# EAGLE board panel4 (EAGLE 7.0.0)
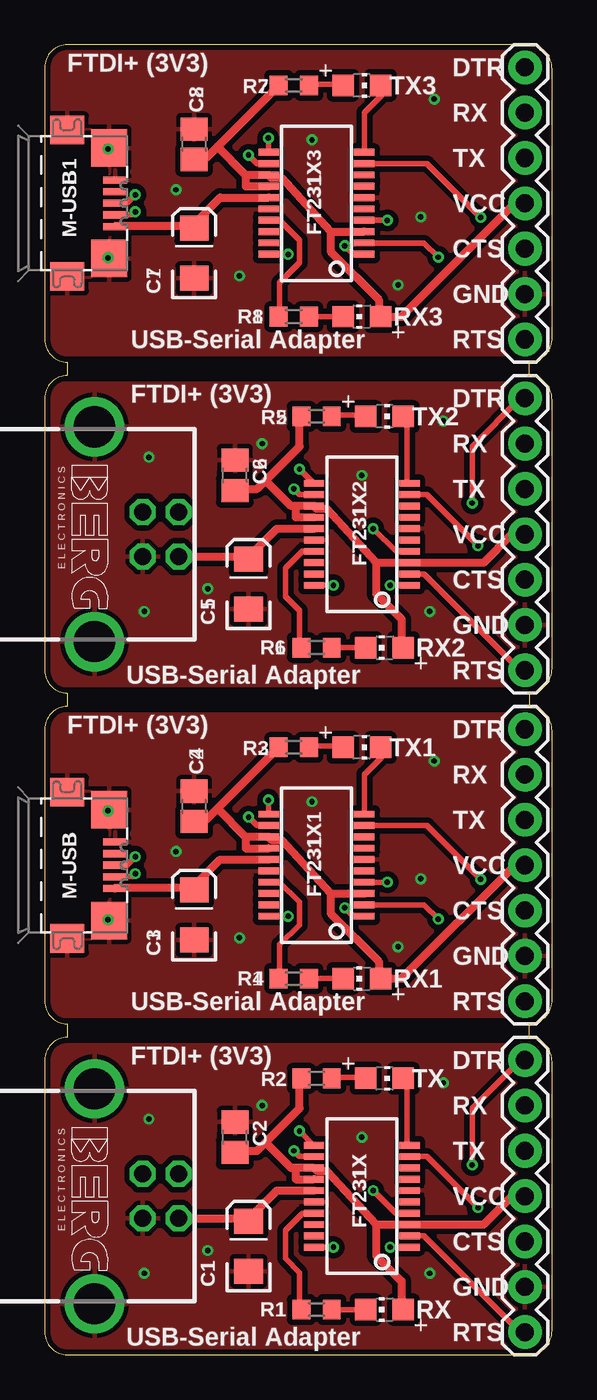
[diagram p0: board, top side]
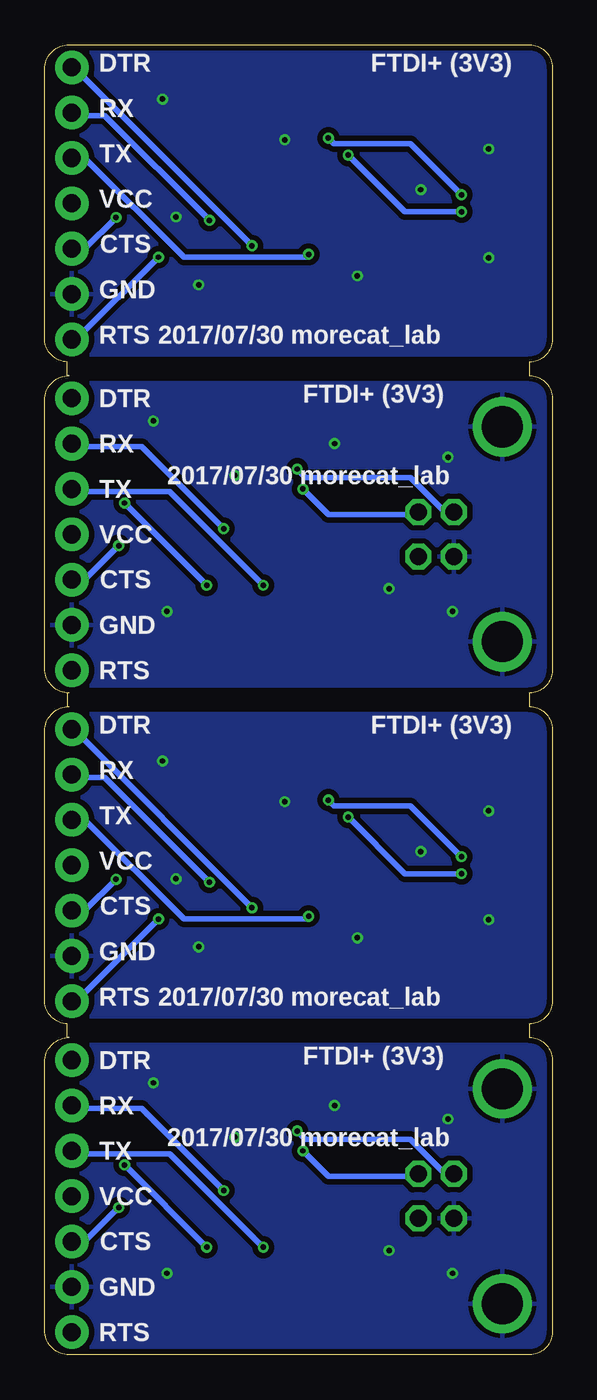
[diagram p1: board, bottom side, seen from below]

Size 28.45 x 73.41 mm. Coordinates in mm from the lower left corner, seen from the top.
Outline: 27.08,36.32 arc-90 28.45,34.95 28.45,19.91 arc-90 27.18,18.54 27.18,17.78 27.08,17.78 arc-90 28.45,16.41 28.45,1.37 arc-90 27.08,0 1.27,0 arc-90 0,1.27 0,16.51 arc-90 1.27,17.78 1.27,18.54 arc-90 0,19.81 0,35.05 arc-90 1.27,36.32 1.27,37.08 arc-90 0,38.35 0,53.59 arc-90 1.27,54.86 1.27,55.63 arc-90 0,56.9 0,72.14 arc-90 1.27,73.41 27.08,73.41 arc-90 28.45,72.04 28.45,56.99 arc-90 27.18,55.63 27.18,54.86 27.08,54.86 arc-90 28.45,53.5 28.45,38.45 arc-90 27.08,37.08
Outline: 27.18,37.08 27.18,36.32
Copper layers (1*16): Top 0.035mm / dielectric 1.5mm / Bottom 0.035mm
Design rules "Elecrow_2-layer_eagle_rule": minimum track width 6mil, minimum drill 12mil, track to track 6mil, track to pad 6mil, pad to pad 6mil, via to via 6mil, smd to smd 0mil, copper to edge 10mil, drill to drill 10mil, minimum pad ring 10mil, minimum via ring 6mil, stop-mask expansion 2mil, vias tented up to drill 100mil, thermal gap 10mil
Net classes: 0 default: width 0.305 mm; 1 PWR: width 0.457 mm
tRestrict: area 0,17.8 to 27.9,18.5; area 0,54.9 to 27.9,55.6; area 0,36.3 to 27.9,37.1
bRestrict: area 0,17.8 to 27.9,18.5; area 0,54.9 to 27.9,55.6; area 0,36.3 to 27.9,37.1

## Footprints (pad centres in the part's own frame; a part is rotated, then mirrored left to right if it is on the bottom)
EIA3216 = smd 1.4 x 1.6: A 1.4,0; C -1.4,0
C0805 = smd 1.3 x 1.5: 1 -0.85,0; 2 0.85,0
SSOP20_L = smd 0.381 x 1.143: 1 -2.857,-2.68; 2 -2.223,-2.68; 3 -1.587,-2.68; 4 -0.953,-2.68; 5 -0.318,-2.68; 6 0.318,-2.68; 7 0.953,-2.68; 8 1.587,-2.68; 9 2.223,-2.68; 10 2.857,-2.68; 11 2.857,2.68; 12 2.223,2.68; 13 1.587,2.68; 14 0.953,2.68; 15 0.318,2.68; 16 -0.318,2.68; 17 -0.953,2.68; 18 -1.587,2.68; 19 -2.223,2.68; 20 -2.857,2.68
1X07 = drill 1.016 pad 1.88: 1 0,0; 2 2.54,0; 3 5.08,0; 4 7.62,0; 5 10.16,0; 6 12.7,0; 7 15.24,0
ZX62R-B-5P = smd 1.35 x 0.4: 1 2.675,-1.3; 2 2.675,-0.65; 3 2.675,0; 4 2.675,0.65; 5 2.675,1.3 | smd 1.9 x 1.6: M1 0,-4.1; M2 0,4.1 | smd 2 x 2.1: M3 2.35,3.1; M4 2.35,-3.1
R0603 = smd 1 x 1.1: 1 -0.85,0; 2 0.85,0
CHIP-LED0805 = smd 1.2 x 1.2: A 0,-1.05; C 0,1.05
PN61729-S = drill 0.95 octagon: 1 1.25,4.71; 2 -1.25,4.71; 3 -1.25,2.71; 4 1.25,2.71 | drill 2.3 pad 2.9: S1 -6.02,0; S2 6.02,0

## Placement (x,y rotation side)
C1  10uF  [EIA3216]  11.43,6.1 90 top
C2  1uF  [C0805]  10.67,12.19 90 top
C3  10uF  [EIA3216]  8.38,24.64 90 top
C4  1uF  [C0805]  8.38,30.73 90 top
C5  10uF  [EIA3216]  11.43,43.18 90 top
C6  1uF  [C0805]  10.67,49.28 90 top
C7  10uF  [EIA3216]  8.38,61.72 90 top
C8  1uF  [C0805]  8.38,67.82 90 top
FT231X  FT231XS  [SSOP20_L]  17.78,8.89 90 top
FT231X1  FT231XS  [SSOP20_L]  15.24,27.43 90 top
FT231X2  FT231XS  [SSOP20_L]  17.78,45.97 90 top
FT231X3  FT231XS  [SSOP20_L]  15.24,64.52 90 top
JP1  [1X07]  26.92,19.81 90 top
JP2  [1X07]  26.92,1.27 90 top
JP3  [1X07]  26.92,38.35 90 top
JP4  [1X07]  26.92,56.9 90 top
M-USB  MICROUSB  [ZX62R-B-5P]  1.27,27.43 0 top
M-USB1  MICROUSB  [ZX62R-B-5P]  1.27,64.52 0 top
R1  1K  [R0603]  15.24,2.54 0 top
R2  1K  [R0603]  15.24,15.49 180 top
R3  1K  [R0603]  13.97,34.04 180 top
R4  1K  [R0603]  13.97,21.08 0 top
R5  1K  [R0603]  15.24,52.58 180 top
R6  1K  [R0603]  15.24,39.62 0 top
R7  1K  [R0603]  13.97,71.12 180 top
R8  1K  [R0603]  13.97,58.17 0 top
RX  [CHIP-LED0805]  19.05,2.54 90 top
RX1  [CHIP-LED0805]  17.78,21.08 90 top
RX2  [CHIP-LED0805]  19.05,39.62 90 top
RX3  [CHIP-LED0805]  17.78,58.17 90 top
TX  [CHIP-LED0805]  19.05,15.49 270 top
TX1  [CHIP-LED0805]  17.78,34.04 270 top
TX2  [CHIP-LED0805]  19.05,52.58 270 top
TX3  [CHIP-LED0805]  17.78,71.12 270 top
X1  PN61729-S  [PN61729-S]  2.79,8.89 270 top
X2  PN61729-S  [PN61729-S]  2.79,45.97 270 top

## Library data of the parts
C1 C3 C5 C7 = SparkFun-Passives
C2 C4 C6 C8 = adafruit
FT231X FT231X1-FT231X3 = SparkFun-DigitalIC
JP1-JP4 = SparkFun-Connectors
M-USB M-USB1 = con-hirose
R1-R8 RX RX1-RX3 TX TX1-TX3 = adafruit-2
X1 X2 = con-berg; OC_FARNELL: unknown; OC_NEWARK: unknown

## Nets
3.3V [PWR]: C2.1 FT231X.3 FT231X.13 FT231X.14 JP2.4 R2.2 RX.A
3.3V1 [PWR]: C4.1 FT231X1.3 FT231X1.13 FT231X1.14 JP1.4 R3.2 RX1.A
3.3V2 [PWR]: C6.1 FT231X2.3 FT231X2.13 FT231X2.14 JP3.4 R5.2 RX2.A
3.3V3 [PWR]: C8.1 FT231X3.3 FT231X3.13 FT231X3.14 JP4.4 R7.2 RX3.A
CBUS0: FT231X.18
CBUS1: FT231X1.19
CBUS2: FT231X1.18
CBUS3: FT231X.19
CBUS4: FT231X2.19
CBUS5: FT231X2.18
CBUS6: FT231X3.19
CBUS7: FT231X3.18
CTS: FT231X.9 JP2.3
CTS1: FT231X1.9 JP1.3
CTS2: FT231X2.9 JP3.3
CTS3: FT231X3.9 JP4.3
DCD: FT231X.8
DCD1: FT231X1.8
DCD2: FT231X2.8
DCD3: FT231X3.8
DSR: FT231X.7
DSR1: FT231X1.7
DSR2: FT231X2.7
DSR3: FT231X3.7
DTR: FT231X.1 JP2.7
DTR1: FT231X1.1 JP1.7
DTR2: FT231X2.1 JP3.7
DTR3: FT231X3.1 JP4.7
GND [PWR]: C1.C C2.2 FT231X.6 FT231X.16 JP2.2 X1.4 X1.S1 X1.S2
GND1 [PWR]: C3.C C4.2 FT231X1.6 FT231X1.16 JP1.2 M-USB.5 M-USB.M1 M-USB.M2 M-USB.M3 M-USB.M4
GND2 [PWR]: C7.C C8.2 FT231X3.6 FT231X3.16 JP4.2 M-USB1.5 M-USB1.M1 M-USB1.M2 M-USB1.M3 M-USB1.M4
GND3 [PWR]: C5.C C6.2 FT231X2.6 FT231X2.16 JP3.2 X2.4 X2.S1 X2.S2
N$1: R2.1 TX.A
N$2: FT231X1.11 M-USB.3
N$3: FT231X.11 X1.3
N$4: FT231X.12 X1.2
N$5: FT231X1.12 M-USB.2
N$6: R1.2 RX.C
N$7: R4.2 RX1.C
N$8: R3.1 TX1.A
N$9: FT231X2.11 X2.3
N$10: FT231X2.12 X2.2
N$11: R6.2 RX2.C
N$12: R5.1 TX2.A
N$13: FT231X3.11 M-USB1.3
N$14: FT231X3.12 M-USB1.2
N$15: R8.2 RX3.C
N$16: R7.1 TX3.A
RI: FT231X.5
RI1: FT231X1.5
RI2: FT231X2.5
RI3: FT231X3.5
RTS: FT231X.2 JP2.1
RTS1: FT231X1.2 JP1.1
RTS2: FT231X2.2 JP3.1
RTS3: FT231X3.2 JP4.1
RXD: FT231X.4 JP2.6
RXD1: FT231X1.4 JP1.6
RXD2: FT231X2.4 JP3.6
RXD3: FT231X3.4 JP4.6
RXLED: FT231X.17 R1.1
RXLED1: FT231X1.17 R4.1
RXLED2: FT231X2.17 R6.1
RXLED3: FT231X3.17 R8.1
TXD: FT231X.20 JP2.5
TXD1: FT231X1.20 JP1.5
TXD2: FT231X2.20 JP3.5
TXD3: FT231X3.20 JP4.5
TXLED: FT231X.10 TX.C
TXLED1: FT231X1.10 TX1.C
TXLED2: FT231X2.10 TX2.C
TXLED3: FT231X3.10 TX3.C
VCC [PWR]: C1.A FT231X.15 X1.1
VCC1 [PWR]: C3.A FT231X1.15 M-USB.1
VCC2 [PWR]: C5.A FT231X2.15 X2.1
VCC3 [PWR]: C7.A FT231X3.15 M-USB1.1

## Tracks (layer width: path | path; a pad name or v marks a point on that pad's centre or on a via)
3.3V
  Top 0.457: 12.38,11.91 11.91,11.43 10.79,11.43 C2.1 | 12.38,11.91 14.29,13.81 14.29,15.4 R2.2 | 14.06,10.48 14.06,9.84 FT231X.14 | 18.57,7.3 FT231X.3 24.61,7.3 26.19,8.89 JP2.4 | 18.57,7.3 15.81,10.32 15.24,10.32 FT231X.13 14.06,10.48 | 18.57,7.3 18.57,5.56 20,4.13 20,2.54 RX.A | 12.38,11.91 13.81,10.48 14.06,10.48
3.3V1
  Top 0.457: 9.68,30.61 9.05,29.97 8.41,29.97 C4.1 | 9.68,30.61 13.02,33.94 R3.2 | 11.27,29.02 11.27,28.38 FT231X1.14 | 16.03,25.84 FT231X1.3 | 16.03,25.84 13.27,28.86 12.7,28.86 FT231X1.13 11.27,29.02 | 16.03,25.84 16.03,24.73 18.73,22.04 18.73,21.08 RX1.A 20,21.08 26.35,27.43 JP1.4 | 11.27,29.02 9.68,30.61
3.3V2
  Top 0.457: 12.38,48.99 11.91,48.51 10.79,48.51 C6.1 | 12.38,48.99 14.29,50.9 14.29,52.48 R5.2 | 14.06,47.56 14.06,46.93 FT231X2.14 | 18.57,44.39 FT231X2.3 24.61,44.39 26.19,45.97 JP3.4 | 18.57,44.39 15.81,47.4 15.24,47.4 FT231X2.13 14.06,47.56 | 18.57,44.39 18.57,42.64 20,41.21 20,39.62 RX2.A | 12.38,48.99 13.81,47.56 14.06,47.56
3.3V3
  Top 0.457: 9.68,67.69 9.05,67.06 8.41,67.06 C8.1 | 9.68,67.69 13.02,71.03 R7.2 | 11.27,66.1 11.27,65.47 FT231X3.14 | 16.03,62.93 FT231X3.3 | 16.03,62.93 13.27,65.94 12.7,65.94 FT231X3.13 11.27,66.1 | 16.03,62.93 16.03,61.82 18.73,59.12 18.73,58.17 RX3.A 20,58.17 26.35,64.52 JP4.4 | 11.27,66.1 9.68,67.69
CTS  (via drill 0.3)
  Top 0.305: FT231X.9 21.43,11.11 v24.29,8.26
  Bottom 0.305: v24.29,8.26 26.19,6.35 JP2.3
CTS1  (via drill 0.3)
  Top 0.305: FT231X1.9 21.43,29.65 v24.45,26.64
  Bottom 0.305: v24.45,26.64 26.19,24.89 JP1.3
CTS2  (via drill 0.3)
  Top 0.305: FT231X2.9 21.43,48.2 v24.29,45.34
  Bottom 0.305: v24.29,45.34 26.19,43.43 JP3.3
CTS3  (via drill 0.3)
  Top 0.305: FT231X3.9 21.43,66.74 v24.45,63.72
  Bottom 0.305: v24.45,63.72 26.19,61.98 JP4.3
DTR  (via drill 0.3)
  Top 0.305: v19.37,6.03 FT231X.1 | v23.97,10.64 23.97,13.81 26.67,16.51 JP2.7
  Bottom 0.305: v23.97,10.64 v19.37,6.03
DTR1  (via drill 0.3)
  Top 0.305: FT231X1.1 17.3,24.57 v16.83,25.05
  Bottom 0.305: v16.83,25.05 26.83,35.05 JP1.7
DTR2  (via drill 0.3)
  Top 0.305: v19.37,43.12 FT231X2.1 | v23.97,47.72 23.97,50.9 26.67,53.59 JP3.7
  Bottom 0.305: v23.97,47.72 v19.37,43.12
DTR3  (via drill 0.3)
  Top 0.305: FT231X3.1 17.3,61.66 v16.83,62.13
  Bottom 0.305: v16.83,62.13 26.83,72.14 JP4.7
GND  (via drill 0.3)
  other vias: 5.59,4.57 9.14,5.84 5.84,13.21 21.59,4.57 12.19,13.97 17.78,12.19 22.35,15.24
  pour Top (isolate 0.305): 0,17.78 0,0 28.45,0 28.45,17.78
  pour Bottom (isolate 0.305): 28.45,17.78 0,17.78 0,0 28.45,0
GND1  (via drill 0.3)
  other vias: 3.56,24.38 10.92,23.37 7.37,28.19 3.56,30.48 19.81,22.86 14.99,30.99 21.08,26.67 21.84,33.27
  pour Bottom (isolate 0.305): 28.45,36.32 0,36.32 0,18.54 28.45,18.54
  pour Top (isolate 0.305): 0,36.32 0,18.54 28.45,18.54 28.45,36.32
GND2  (via drill 0.3)
  other vias: 3.56,61.47 10.92,60.45 7.37,65.28 3.56,67.56 19.81,59.94 14.99,68.07 21.08,63.75 21.84,70.36
  pour Bottom (isolate 0.305): 28.45,73.41 0,73.41 0,55.63 28.45,55.63
  pour Top (isolate 0.305): 0,73.41 0,55.63 28.45,55.63 28.45,73.41
GND3  (via drill 0.3)
  other vias: 5.59,41.66 9.14,42.93 5.84,50.29 21.59,41.66 12.19,51.05 17.78,49.28 22.35,52.32
  pour Top (isolate 0.305): 0,54.86 0,37.08 28.45,37.08 28.45,54.86
  pour Bottom (isolate 0.305): 28.45,54.86 0,54.86 0,37.08 28.45,37.08
N$1
  Top 0.305: R2.1 16.19,15.56 17.94,15.56 TX.A
N$2  (via drill 0.3)
  Top 0.305: v12.54,31.08 12.54,30.29 FT231X1.11 | v5.08,27.91 4.6,27.43 M-USB.3
  Bottom 0.305: v12.54,31.08 12.22,30.77 7.94,30.77 v5.08,27.91
N$3  (via drill 0.3)
  Top 0.305: v14.29,12.54 15.08,11.75 FT231X.11
  Bottom 0.305: v14.29,12.54 13.81,12.06 7.94,12.06 6.03,10.16 5.56,10.16 X1.3
N$4  (via drill 0.3)
  Top 0.305: FT231X.12 14.29,11.11 v13.97,11.43
  Bottom 0.305: v13.97,11.43 12.54,10 7.62,10 X1.2
N$5  (via drill 0.3)
  Top 0.305: FT231X1.12 11.91,29.65 v11.43,30.13 | v5.08,26.96 4.92,26.8 3.97,26.8 M-USB.2
  Bottom 0.305: v11.43,30.13 8.26,26.96 v5.08,26.96
N$6
  Top 0.305: RX.C R1.2
N$7
  Top 0.305: RX1.C R4.2
N$8
  Top 0.305: R3.1 14.92,34.1 16.67,34.1 TX1.A
N$9  (via drill 0.3)
  Top 0.305: v14.29,49.62 15.08,48.83 FT231X2.11
  Bottom 0.305: v14.29,49.62 13.81,49.15 7.94,49.15 6.03,47.24 5.56,47.24 X2.3
N$10  (via drill 0.3)
  Top 0.305: FT231X2.12 14.29,48.2 v13.97,48.51
  Bottom 0.305: v13.97,48.51 12.54,47.09 7.62,47.09 X2.2
N$11
  Top 0.305: RX2.C R6.2
N$12
  Top 0.305: R5.1 16.19,52.64 17.94,52.64 TX2.A
N$13  (via drill 0.3)
  Top 0.305: v12.54,68.17 12.54,67.37 FT231X3.11 | v5.08,64.99 4.6,64.52 M-USB1.3
  Bottom 0.305: v12.54,68.17 12.22,67.85 7.94,67.85 v5.08,64.99
N$14  (via drill 0.3)
  Top 0.305: FT231X3.12 11.91,66.74 v11.43,67.22 | v5.08,64.04 4.92,63.88 3.97,63.88 M-USB1.2
  Bottom 0.305: v11.43,67.22 8.26,64.04 v5.08,64.04
N$15
  Top 0.305: RX3.C R8.2
N$16
  Top 0.305: R7.1 14.92,71.18 16.67,71.18 TX3.A
RTS
  Top 0.305: FT231X.2 21.27,6.67 26.67,1.27 JP2.1
RTS1  (via drill 0.3)
  Top 0.305: FT231X1.2 21.27,25.21 v22.07,24.42
  Bottom 0.305: v22.07,24.42 26.67,19.81 JP1.1
RTS2
  Top 0.305: FT231X2.2 21.27,43.75 26.67,38.35 JP3.1
RTS3  (via drill 0.3)
  Top 0.305: FT231X3.2 21.27,62.29 v22.07,61.5
  Bottom 0.305: v22.07,61.5 26.67,56.9 JP4.1
RXD  (via drill 0.3)
  Top 0.305: FT231X.4 19.68,7.94 v18.41,9.21
  Bottom 0.305: v18.41,9.21 23.02,13.81 26.67,13.81 26.83,13.97 JP2.6
RXD1  (via drill 0.3)
  Top 0.305: v19.21,26.48 FT231X1.4
  Bottom 0.305: v19.21,26.48 25.08,32.35 26.67,32.35 26.83,32.51 JP1.6
RXD2  (via drill 0.3)
  Top 0.305: FT231X2.4 19.68,45.02 v18.41,46.29
  Bottom 0.305: v18.41,46.29 23.02,50.9 26.67,50.9 26.83,51.05 JP3.6
RXD3  (via drill 0.3)
  Top 0.305: v19.21,63.56 FT231X3.4
  Bottom 0.305: v19.21,63.56 25.08,69.44 26.67,69.44 26.83,69.6 JP4.6
RXLED
  Top 0.305: FT231X.17 14.45,7.94 13.49,6.99 13.49,5.4 14.29,4.6 14.29,2.54 R1.1
RXLED1
  Top 0.305: FT231X1.17 13.18,26.48 14.29,25.37 14.29,24.1 13.18,22.99 13.18,21.08 R4.1
RXLED2
  Top 0.305: FT231X2.17 14.45,45.02 13.49,44.07 13.49,42.48 14.29,41.69 14.29,39.62 R6.1
RXLED3
  Top 0.305: FT231X3.17 13.18,63.56 14.29,62.45 14.29,61.18 13.18,60.07 13.18,58.17 R8.1
TXD  (via drill 0.3)
  Top 0.305: v16.19,6.03 FT231X.20
  Bottom 0.305: v16.19,6.03 21.43,11.27 26.67,11.27 26.83,11.43 JP2.5
TXD1  (via drill 0.3)
  Top 0.305: v13.65,24.57 FT231X1.20
  Bottom 0.305: v13.65,24.57 13.81,24.42 20.64,24.42 26.19,29.97 JP1.5
TXD2  (via drill 0.3)
  Top 0.305: v16.19,43.12 FT231X2.20
  Bottom 0.305: v16.19,43.12 21.43,48.35 26.67,48.35 26.83,48.51 JP3.5
TXD3  (via drill 0.3)
  Top 0.305: v13.65,61.66 FT231X3.20
  Bottom 0.305: v13.65,61.66 13.81,61.5 20.64,61.5 26.19,67.06 JP4.5
TXLED
  Top 0.305: FT231X.10 20.32,11.75 20.32,15.24 20.16,15.4 TX.C
TXLED1
  Top 0.305: FT231X1.10 17.94,30.29 17.94,32.51 18.89,33.47 18.89,33.94 TX1.C
TXLED2
  Top 0.305: FT231X2.10 20.32,48.83 20.32,52.32 20.16,52.48 TX2.C
TXLED3
  Top 0.305: FT231X3.10 17.94,67.37 17.94,69.6 18.89,70.55 18.89,71.03 TX3.C
VCC
  Top 0.457: FT231X.15 13.02,9.21 11.43,7.62 C1.A 11.27,7.62 7.62,7.62 X1.1
VCC1
  Top 0.457: FT231X1.15 9.84,27.75 8.26,26.16 C3.A 8.1,26.16 3.97,26.16 M-USB.1
VCC2
  Top 0.457: FT231X2.15 13.02,46.29 11.43,44.7 C5.A 11.27,44.7 7.62,44.7 X2.1
VCC3
  Top 0.457: FT231X3.15 9.84,64.83 8.26,63.25 C7.A 8.1,63.25 3.97,63.25 M-USB1.1

## Text on the board
tPlace: FTDI+ (3V3) | DTR | RX | TX | VCC | CTS | GND | RTS | USB-Serial Adapter | DTR | FTDI+ (3V3) | RX | TX | VCC | CTS | GND | USB-Serial Adapter | RTS | FTDI+ (3V3) | DTR | RX | TX | VCC | CTS | GND | RTS | USB-Serial Adapter | DTR | FTDI+ (3V3) | RX | TX | VCC | CTS | GND | USB-Serial Adapter | RTS
bNames: FTDI+ (3V3) | DTR | RX | TX | VCC | CTS | GND | 2017/07/30 morecat_lab | RTS | DTR | FTDI+ (3V3) | RX | 2017/07/30 morecat_lab | TX | VCC | CTS | GND | RTS | FTDI+ (3V3) | DTR | RX | TX | VCC | CTS | GND | 2017/07/30 morecat_lab | RTS | DTR | FTDI+ (3V3) | RX | 2017/07/30 morecat_lab | TX | VCC | CTS | GND | RTS
_tNames: R2 | TX | C2 | M-USB | FT231X | C1 | R1 | RX | R2 | TX | C2 | FT231X | C1 | R1 | RX | R2 | TX | C2 | M-USB | FT231X | C1 | R1 | RX | R2 | TX | C2 | FT231X | C1 | R1 | RX